# EAGLE board board (EAGLE 6.5.0)
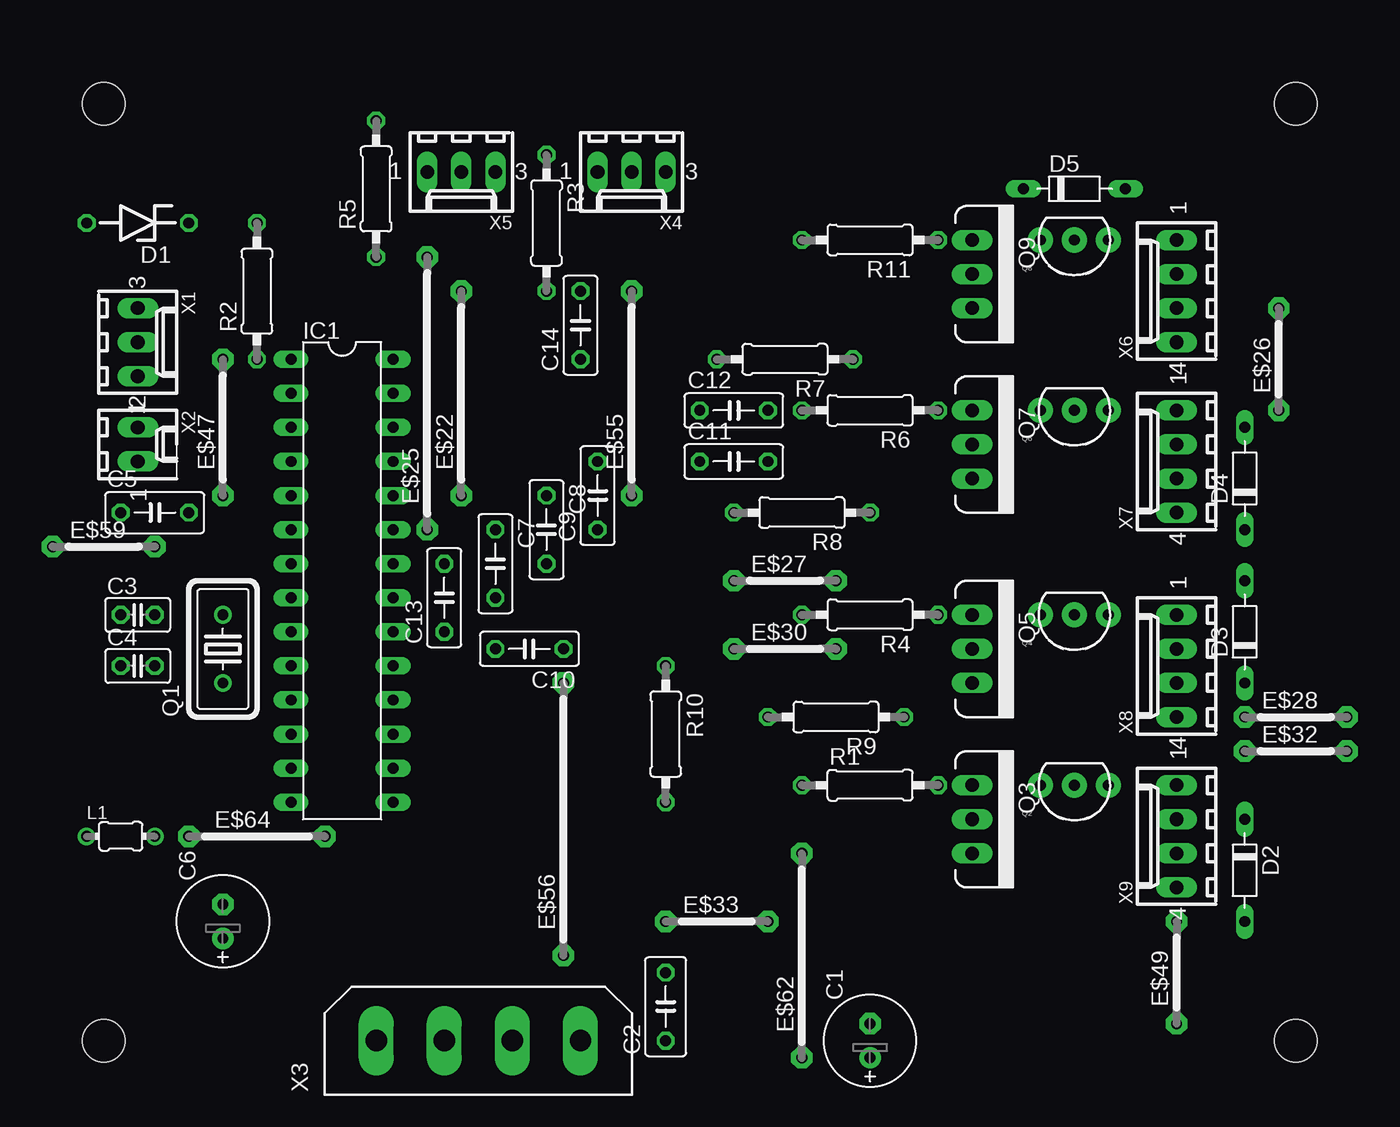
[diagram p0: board, top side]
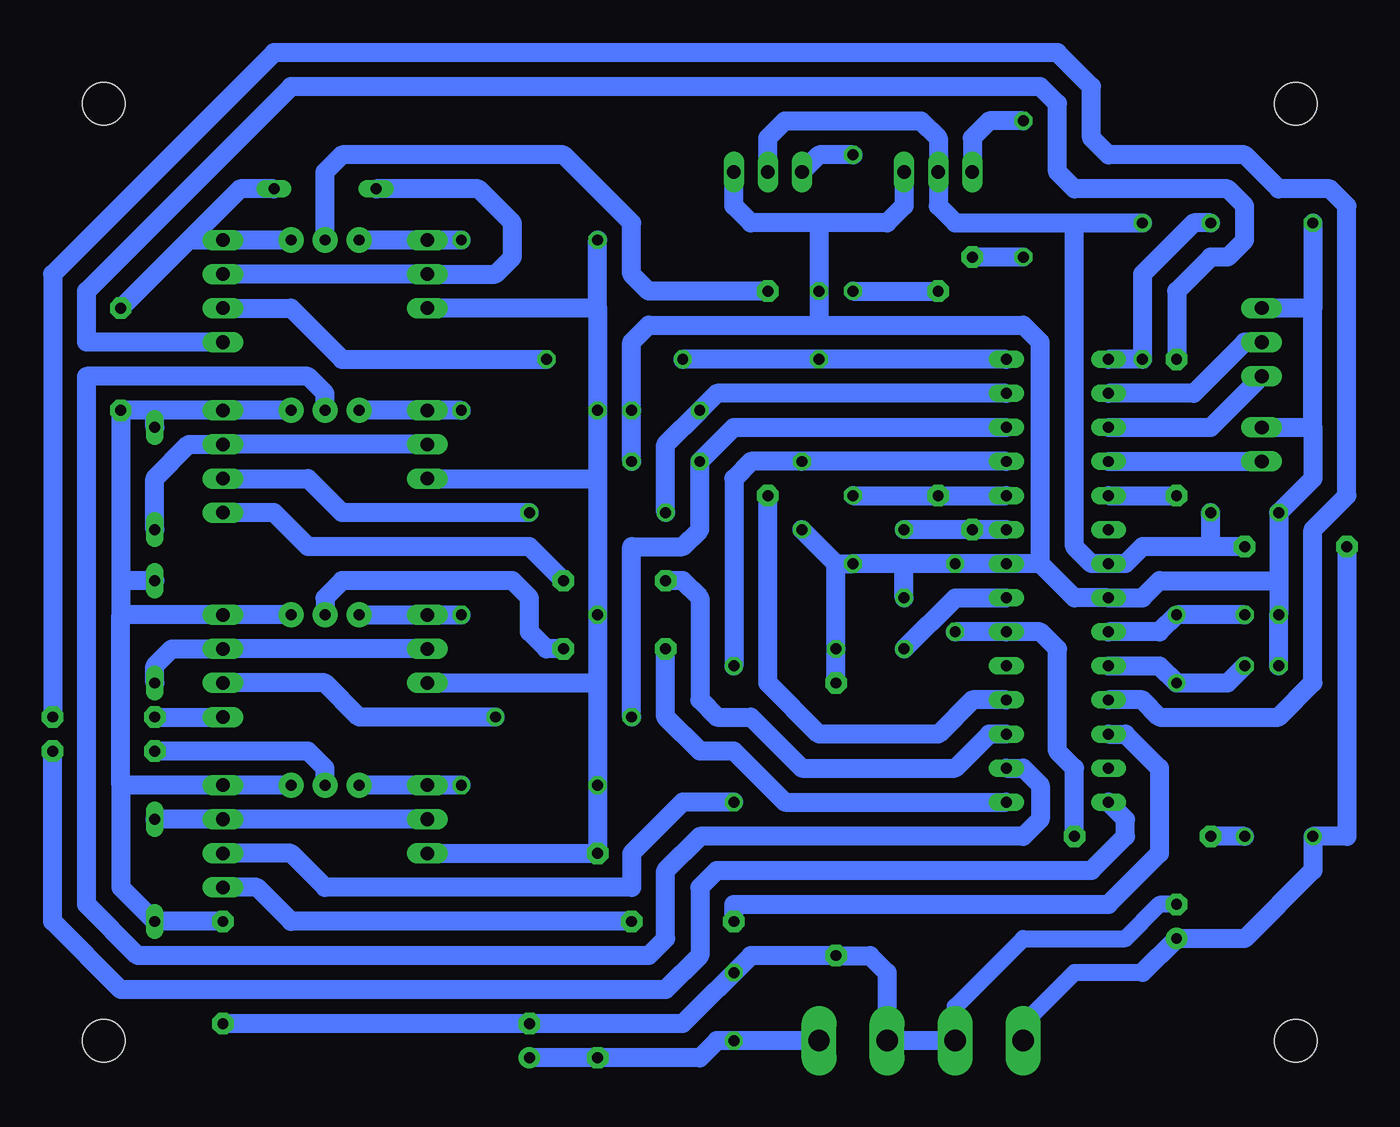
[diagram p1: board, bottom side, seen from below]

No outline drawn. Coordinates in mm, seen from the top.
Copper layers (1*16): Top 0.035mm / dielectric 1.5mm / Bottom 0.035mm
Design rules "default": minimum track width 10mil, minimum drill 24mil, track to track 8mil, track to pad 8mil, pad to pad 8mil, via to via 8mil, smd to smd 8mil, copper to edge 40mil, drill to drill 8mil, minimum pad ring 10mil, minimum via ring 8mil, stop-mask expansion 4mil, vias tented up to drill 0mil, thermal gap 10mil
Holes 3.2 mm at 5.08,74.93 5.08,5.08 93.98,74.93 93.98,5.08

## Footprints (pad centres in the part's own frame; a part is rotated, then mirrored left to right if it is on the bottom)
E2,5-7 = drill 0.813 pad 1.6: + -1.27,0 | drill 0.813 pad 1.6 octagon: - 1.27,0
C050-030X075 = drill 0.813 octagon: 1 -2.54,0; 2 2.54,0
C025-025X050 = drill 0.813 octagon: 1 -1.27,0; 2 1.27,0
C050-025X075 = drill 0.813 octagon: 1 -2.54,0; 2 2.54,0
ZDIO-7.5 = drill 0.813 octagon: A 3.81,0; C -3.81,0
D-7.5 = drill 0.813 long: A 3.81,0; C -3.81,0
15 = drill 0.813 pad 1.6 octagon: 1 -7.62,0; 2 7.62,0
20 = drill 0.813 pad 1.6 octagon: 1 -10.16,0; 2 10.16,0
07 = drill 0.813 pad 1.6 octagon: 1 -3.81,0; 2 3.81,0
10 = drill 0.813 pad 1.6 octagon: 1 -5.08,0; 2 5.08,0
DIL28-3 = drill 0.813 long: 1 -16.51,-3.81; 2 -13.97,-3.81; 3 -11.43,-3.81; 4 -8.89,-3.81; 5 -6.35,-3.81; 6 -3.81,-3.81; 7 -1.27,-3.81; 8 1.27,-3.81; 9 3.81,-3.81; 10 6.35,-3.81; 11 8.89,-3.81; 12 11.43,-3.81; 13 13.97,-3.81; 14 16.51,-3.81; 15 16.51,3.81; 16 13.97,3.81; 17 11.43,3.81; 18 8.89,3.81; 19 6.35,3.81; 20 3.81,3.81; 21 1.27,3.81; 22 -1.27,3.81; 23 -3.81,3.81; 24 -6.35,3.81; 25 -8.89,3.81; 26 -11.43,3.81; 27 -13.97,3.81; 28 -16.51,3.81
LAL02 = drill 0.8 pad 1.3: 1 -2.54,0; 2 2.54,0
HC18U-V = drill 0.813: 1 -2.54,0; 2 2.54,0
TO-92-AMMO = drill 0.813 pad 1.88: 1 -2.54,0; 2 0,0; 3 2.54,0
TO220V = drill 1.016 long: 1 -2.54,0; 2 0,0; 3 2.54,0
0207/10 = drill 0.813 octagon: 1 -5.08,0; 2 5.08,0
6410-03 = drill 1.016 long: 1 2.54,0; 2 0,0; 3 -2.54,0
6410-02 = drill 1.016 long: 1 1.27,0; 2 -1.27,0
9090-4V = drill 1.6 pad 2.6 long: 1 -7.62,0; 2 -2.54,0; 3 2.54,0; 4 7.62,0
6410-04 = drill 1.016 long: 1 3.81,0; 2 1.27,0; 3 -1.27,0; 4 -3.81,0

## Placement (x,y rotation side)
C1  [E2,5-7]  62.23,5.08 90 top
C2  [C050-030X075]  46.99,7.62 90 top
C3  [C025-025X050]  7.62,36.83 0 top
C4  [C025-025X050]  7.62,33.02 0 top
C5  [C050-030X075]  8.89,44.45 0 top
C6  [E2,5-7]  13.97,13.97 90 top
C7  [C050-025X075]  34.29,40.64 270 top
C8  [C050-025X075]  38.1,43.18 270 top
C9  [C050-025X075]  41.91,45.72 90 top
C10  [C050-025X075]  36.83,34.29 180 top
C11  [C050-025X075]  52.07,48.26 0 top
C12  [C050-025X075]  52.07,52.07 0 top
C13  [C050-025X075]  30.48,38.1 90 top
C14  [C050-025X075]  40.64,58.42 90 top
D1  [ZDIO-7.5]  7.62,66.04 180 top
D2  [D-7.5]  90.17,17.78 270 top
D3  [D-7.5]  90.17,35.56 90 top
D4  [D-7.5]  90.17,46.99 90 top
D5  [D-7.5]  77.47,68.58 0 top
E$22  [15]  31.75,53.34 90 top
E$25  [20]  29.21,53.34 90 top
E$26  [07]  92.71,55.88 90 top
E$27  [07]  55.88,39.37 0 top
E$28  [07]  93.98,29.21 0 top
E$30  [07]  55.88,34.29 0 top
E$32  [07]  93.98,26.67 0 top
E$33  [07]  50.8,13.97 0 top
E$47  [10]  13.97,50.8 90 top
E$49  [07]  85.09,10.16 90 top
E$55  [15]  44.45,53.34 90 top
E$56  [20]  39.37,21.59 90 top
E$59  [07]  5.08,41.91 0 top
E$62  [15]  57.15,11.43 90 top
E$64  [10]  16.51,20.32 0 top
IC1  [DIL28-3]  22.86,39.37 270 top
L1  [LAL02]  6.35,20.32 0 top
Q1  [HC18U-V]  13.97,34.29 90 top
Q2  [TO-92-AMMO]  77.47,24.13 180 top
Q3  [TO220V]  69.85,21.59 270 top
Q4  [TO-92-AMMO]  77.47,36.83 180 top
Q5  [TO220V]  69.85,34.29 270 top
Q6  [TO-92-AMMO]  77.47,52.07 180 top
Q7  [TO220V]  69.85,49.53 270 top
Q8  [TO-92-AMMO]  77.47,64.77 180 top
Q9  [TO220V]  69.85,62.23 270 top
R1  [0207/10]  62.23,24.13 0 top
R2  [0207/10]  16.51,60.96 90 top
R3  [0207/10]  38.1,66.04 270 top
R4  [0207/10]  62.23,36.83 180 top
R5  [0207/10]  25.4,68.58 90 top
R6  [0207/10]  62.23,52.07 180 top
R7  [0207/10]  55.88,55.88 180 top
R8  [0207/10]  57.15,44.45 180 top
R9  [0207/10]  59.69,29.21 180 top
R10  [0207/10]  46.99,27.94 270 top
R11  [0207/10]  62.23,64.77 180 top
X1  [6410-03]  7.62,57.15 270 top
X2  [6410-02]  7.62,49.53 270 top
X3  [9090-4V]  33.02,5.08 0 top
X4  [6410-03]  44.45,69.85 180 top
X5  [6410-03]  31.75,69.85 180 top
X6  [6410-04]  85.09,60.96 90 top
X7  [6410-04]  85.09,48.26 90 top
X8  [6410-04]  85.09,33.02 90 top
X9  [6410-04]  85.09,20.32 90 top

## Library data of the parts
C1-C14 L1 R1-R11 = rcl
D1-D5 = diode
E$22 E$25-E$28 E$30 E$32 E$33 E$47 E$49 E$55 E$56 E$59 E$62 E$64 = jumper
IC1 = ref-packages
Q1 = crystal
Q2-Q9 = sparkfun-discretesemi
X1 X2 X4-X9 = con-molex
X3 = con-thomas-betts

## Nets
S$1: D2.A D3.A D4.A E$49.2 Q2.1 Q4.1 Q6.1 X7.1 X8.1 X9.1
S$2: D5.C Q9.2 X6.2
S$3: D4.C Q7.2 X7.2
S$4: D3.C Q5.2 X8.2
S$5: D2.C Q3.2 X9.2
S$6: E$62.2 Q3.3 Q5.3 Q7.3 Q9.3 R1.1 R4.2 R6.2 R11.2
S$7: Q6.2
S$8: Q2.3 Q3.1 R1.2
S$9: C11.1 R9.2
S$10: Q6.3 Q7.1 R6.1
S$11: Q8.3 Q9.1 R11.1
S$12: R7.1 X6.3
S$13: R8.1 X7.3
S$14: R9.1 X8.3
S$15: R10.2 X9.3
S$16: C12.1 R8.2
S$17: E$32.1 Q2.2
S$18: C9.2 R10.1
S$19: Q4.2
S$20: C5.2 E$59.2 R2.2 X4.2 X5.2
S$21: R7.2
S$22: E$47.2 X6.4
S$23: X1.1
S$24: E$55.2 Q8.2
S$25: E$30.1
S$26: X1.2
S$27: E$28.2
S$29: X9.4
S$30: E$28.1 X8.4
S$31: C3.1 C4.1 C7.2 C8.2 C9.1 C10.1 C11.2 C12.2 D1.A E$56.2 X1.3 X2.2 X4.3 X5.3
S$33: D5.A Q8.1 X6.1
S$34: C13.1 E$64.2
S$35: E$55.1
S$36: X7.4
S$37: E$27.1
S$38: C3.2 Q1.2
S$39: D1.C R2.1
S$40: C4.2 Q1.1
S$41: E$22.2 R3.2
S$42: C1.+ E$62.1 X3.4
S$43: R5.2 X5.1
S$44: C8.1
S$45: E$59.1 L1.1 X3.1
S$46: Q4.3 Q5.1 R4.1
S$47: E$47.1
S$48: R3.1 X4.1
S$49: C10.2
S$50: C7.1
S$51: C6.- E$49.1 E$56.1 X3.2 X3.3
S$52: X2.1
S$56: R5.1
S$57: E$64.1 L1.2

## Tracks (layer width: path | path; a pad name or v marks a point on that pad's centre or on a via)
S$1
  Bottom 1.422: 92.71,39.37 92.71,52.07 90.17,52.07 | 92.71,39.37 92.71,36.83 | 92.71,36.83 X8.1 Q4.1 | 90.17,52.07 X7.1 Q6.1 | Q2.1 X9.1 92.71,24.13 | 92.71,24.13 92.71,36.83 | 92.71,24.13 92.71,16.51 D2.A E$49.2 | D3.A 92.71,39.37 | D4.A 90.17,52.07
S$2
  Bottom 1.422: X6.2 Q9.2 64.77,62.23 63.5,63.5 63.5,66.04 66.04,68.58 D5.C
S$3
  Bottom 1.422: Q7.2 X7.2 87.63,49.53 90.17,46.99 D4.C
S$4
  Bottom 1.422: Q5.2 X8.2 88.9,34.29 90.17,33.02 D3.C
S$5
  Bottom 1.422: Q3.2 X9.2 D2.C
S$6
  Bottom 1.422: Q7.3 57.15,46.99 | 57.15,59.69 Q9.3 | 57.15,59.69 R11.2 | 57.15,59.69 R6.2 57.15,46.99 | 57.15,46.99 R4.2 57.15,31.75 | 57.15,31.75 R1.1 E$62.2 Q3.3 | Q5.3 57.15,31.75
S$7
  Bottom 1.422: Q6.2 77.47,53.34 78.74,54.61 95.25,54.61 95.25,15.24 91.44,11.43 53.34,11.43 52.07,12.7 52.07,17.78 49.53,20.32 25.4,20.32 24.13,21.59 24.13,24.13 25.4,25.4 26.67,25.4
S$8
  Bottom 1.422: R1.2 Q3.1 Q2.3
S$9
  Bottom 1.422: 26.67,50.8 46.99,50.8 C11.1 49.53,43.18 50.8,41.91 54.61,41.91 R9.2
S$10
  Bottom 1.422: R6.1 Q7.1 Q6.3
S$11
  Bottom 1.422: R11.1 Q9.1 Q8.3
S$12
  Bottom 1.422: X6.3 80.01,59.69 76.2,55.88 R7.1
S$13
  Bottom 1.422: R8.1 76.2,44.45 78.74,46.99 X7.3
S$14
  Bottom 1.422: R9.1 74.93,29.21 77.47,31.75 X8.3
S$15
  Bottom 1.422: X9.3 80.01,19.05 77.47,16.51 54.61,16.51 54.61,19.05 50.8,22.86 R10.2
S$16
  Bottom 1.422: 26.67,53.34 48.26,53.34 C12.1 52.07,49.53 R8.2
S$17
  Bottom 1.422: Q2.2 77.47,25.4 78.74,26.67 E$32.1
S$18
  Bottom 1.422: 26.67,48.26 C9.2 45.72,48.26 46.99,46.99 R10.1
S$19
  Bottom 1.422: Q4.2 77.47,38.1 76.2,39.37 63.5,39.37 62.23,38.1 62.23,35.56 60.96,34.29 59.69,34.29
S$20
  Bottom 1.422: 21.59,66.04 30.48,66.04 31.75,67.31 X5.2 31.75,72.39 33.02,73.66 43.18,73.66 44.45,72.39 X4.2 | 21.59,66.04 R2.2 | 21.59,66.04 21.59,41.91 20.32,40.64 19.05,40.64 17.78,40.64 16.51,41.91 11.43,41.91 | E$59.2 11.43,41.91 | 11.43,41.91 C5.2
S$21
  Bottom 1.422: 26.67,55.88 R7.2
S$22
  Bottom 1.422: X6.4 95.25,57.15 95.25,60.96 80.01,76.2 24.13,76.2 22.86,74.93 22.86,69.85 21.59,68.58 10.16,68.58 8.89,67.31 8.89,64.77 10.16,63.5 11.43,63.5 13.97,60.96 E$47.2
S$23
  Bottom 1.422: 19.05,50.8 11.43,50.8 X1.1
S$24
  Bottom 1.422: Q8.2 77.47,69.85 76.2,71.12 59.69,71.12 54.61,66.04 54.61,62.23 53.34,60.96 E$55.2
S$25
  Bottom 1.422: 26.67,22.86 43.18,22.86 46.99,26.67 49.53,26.67 52.07,29.21 E$30.1
S$26
  Bottom 1.422: X1.2 8.89,57.15 12.7,53.34 19.05,53.34
S$27
  Bottom 1.422: E$28.2 97.79,62.23 81.28,78.74 22.86,78.74 20.32,76.2 20.32,72.39 19.05,71.12 8.89,71.12 6.35,68.58 2.54,68.58 1.27,67.31 1.27,45.72 3.81,43.18 3.81,31.75 6.35,29.21 15.24,29.21 16.51,30.48 19.05,30.48
S$28
  Bottom 1.422: 97.79,26.67 97.79,13.97 92.71,8.89 52.07,8.89 49.53,11.43 49.53,16.51 48.26,17.78 20.32,17.78 17.78,20.32 17.78,21.59 19.05,22.86
S$29
  Bottom 1.422: 54.61,13.97 80.01,13.97 82.55,16.51 X9.4
S$30
  Bottom 1.422: E$28.1 X8.4
S$31
  Bottom 1.422: 24.13,40.64 21.59,38.1 19.05,38.1 16.51,38.1 15.24,39.37 6.35,39.37 | 24.13,40.64 26.67,40.64 34.29,40.64 | 34.29,40.64 C8.2 39.37,40.64 | C11.2 C12.2 54.61,57.15 53.34,58.42 40.64,58.42 | X5.3 34.29,67.31 35.56,66.04 40.64,66.04 | 40.64,66.04 40.64,58.42 | 40.64,58.42 25.4,58.42 24.13,57.15 24.13,40.64 | 40.64,66.04 45.72,66.04 46.99,67.31 X4.3 | C7.2 34.29,40.64 | 3.81,59.69 X1.3 | D1.A 3.81,59.69 | X2.2 3.81,50.8 | 3.81,50.8 3.81,59.69 | 3.81,50.8 3.81,46.99 6.35,44.45 6.35,39.37 | 6.35,39.37 C3.1 C4.1 | E$56.2 C10.1 39.37,40.64 | 39.37,40.64 C9.1
S$32
  Bottom 1.422: 46.99,13.97 46.99,15.24 19.05,15.24 15.24,19.05 15.24,25.4 17.78,27.94 19.05,27.94
S$33
  Bottom 1.422: Q8.1 X6.1 87.63,64.77 | 87.63,64.77 92.71,59.69 | D5.A 83.82,68.58 87.63,64.77
S$34
  Bottom 1.422: C13.1 26.67,35.56 24.13,35.56 22.86,34.29 22.86,26.67 21.59,25.4 E$64.2
S$35
  Bottom 1.422: 26.67,30.48 29.21,30.48 31.75,27.94 40.64,27.94 44.45,31.75 E$55.1
S$36
  Bottom 1.422: X7.4 81.28,44.45 78.74,41.91 62.23,41.91 59.69,39.37
S$37
  Bottom 1.422: 26.67,27.94 27.94,27.94 30.48,25.4 41.91,25.4 45.72,29.21 48.26,29.21 49.53,30.48 49.53,38.1 50.8,39.37 E$27.1
S$38
  Bottom 1.422: C3.2 Q1.2 15.24,35.56 19.05,35.56
S$39
  Bottom 1.422: 19.05,55.88 R2.1 16.51,62.23 12.7,66.04 D1.C
S$40
  Bottom 1.422: 19.05,33.02 15.24,33.02 Q1.1 10.16,31.75 C4.2
S$41
  Bottom 1.422: R3.2 E$22.2
S$42
  Bottom 1.422: X3.4 48.26,5.08 49.53,3.81 E$62.1 C1.+
S$43
  Bottom 1.422: R5.2 27.94,73.66 29.21,72.39 X5.1
S$44
  Bottom 1.422: C8.1 26.67,45.72
S$45
  Bottom 1.27: 16.51,10.16 21.59,10.16 25.4,6.35 X3.1
  Bottom 1.422: E$59.1 1.27,20.32 L1.1 3.81,17.78 8.89,12.7 13.97,12.7 16.51,10.16
S$46
  Bottom 1.422: Q4.3 Q5.1 R4.1
S$47
  Bottom 1.422: 19.05,45.72 E$47.1
S$48
  Bottom 1.422: R3.1 40.64,71.12 X4.1
S$49
  Bottom 1.422: C10.2 30.48,38.1 26.67,38.1
S$50
  Bottom 1.422: 26.67,43.18 C7.1
S$51
  Bottom 1.27: X3.2 30.48,7.62 25.4,12.7 17.78,12.7 15.24,15.24 C6.-
  Bottom 1.422: E$49.1 50.8,6.35 45.72,11.43 E$56.1 36.83,11.43 35.56,10.16 X3.3 X3.2
S$52
  Bottom 1.422: 19.05,48.26 X2.1
S$56
  Bottom 1.422: R5.1 29.21,63.5
S$57
  Bottom 1.422: L1.2 E$64.1